# EAGLE board vd_using_sym (EAGLE 9.7.0)
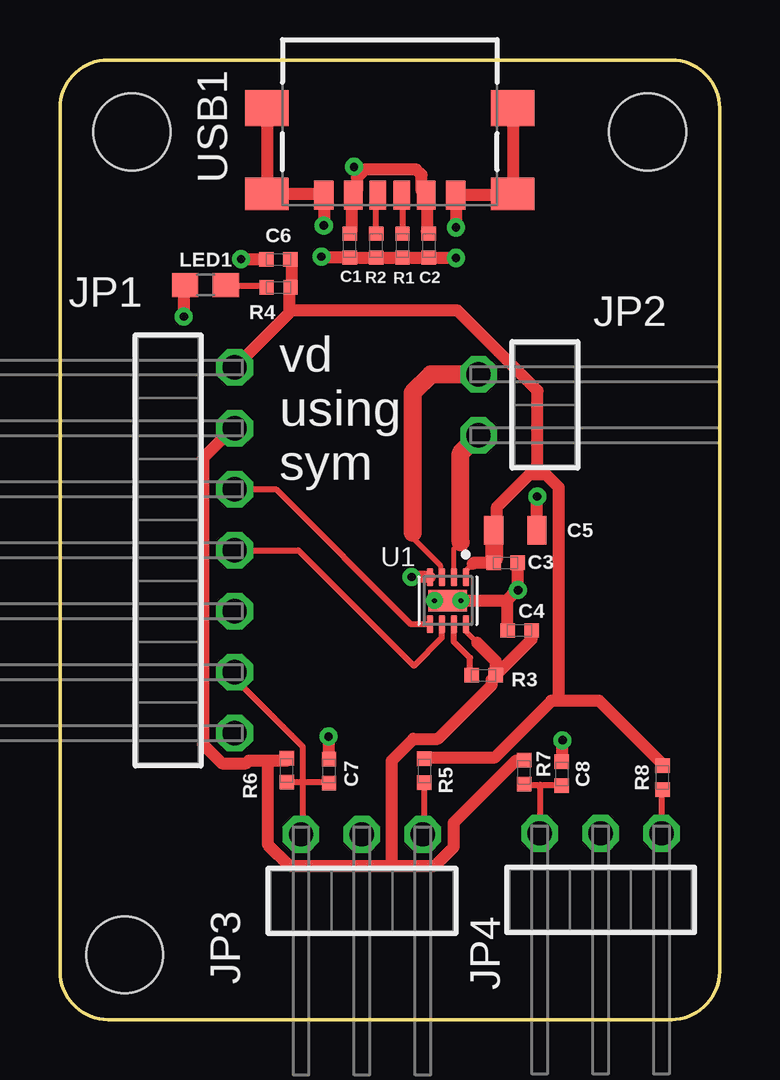
[diagram p0: board, top side]
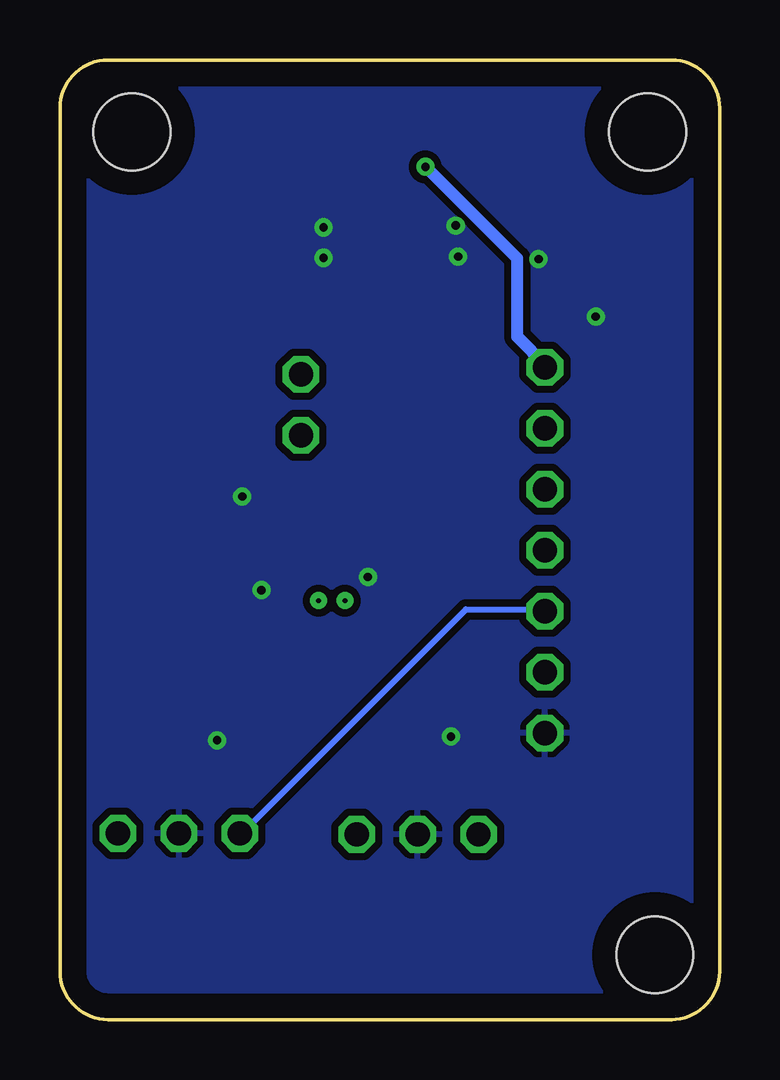
[diagram p1: board, bottom side, seen from below]

Size 27.5 x 40 mm. Coordinates in mm from the lower left corner, seen from the top.
Outline: 25.5,0 2,0 arc-90 0,2 0,38 arc-90 2,40 25.5,40 arc-90 27.5,38 27.5,2 arc-90 25.5,0
Copper layers (1*16): Top 0.035mm / dielectric 1.5mm / Bottom 0.035mm
Design rules "Fusion Electronics Design Rules": minimum track width 0.15mm, minimum drill 0.35mm, track to track 0.2mm, track to pad 0.2mm, pad to pad 0.2mm, via to via 0.2mm, smd to smd 0.2mm, copper to edge 1.02mm, drill to drill 0.2mm, minimum pad ring 10mil, minimum via ring 8mil, stop-mask expansion 4mil, vias tented up to drill 9999mil, thermal gap 10mil
Net classes: 0 default: width 0.25 mm; 1 Power: width 0.5 mm; 2 Motor_connections: width 0.75 mm
Holes 3.2 mm at 3,37 24.5,37 2.69,2.69

## Footprints (pad centres in the part's own frame; a part is rotated, then mirrored left to right if it is on the bottom)
0402-TIGHT = smd 0.6 x 0.6: 1 -0.5,0; 2 0.5,0
0805 = smd 0.8 x 1.2: 1 -0.9,0; 2 0.9,0
1X07_90 = drill 1.016 octagon: 1 -7.62,-2.77; 2 -5.08,-2.77; 3 -2.54,-2.77; 4 0,-2.77; 5 2.54,-2.77; 6 5.08,-2.77; 7 7.62,-2.77
1X02_90 = drill 1.016 octagon: 1 -1.27,-2.77; 2 1.27,-2.77
1X03_90 = drill 1.016 octagon: 1 -2.54,-2.77; 2 0,-2.77; 3 2.54,-2.77
0603 = smd 1.1 x 1: 1 -0.85,0; 2 0.85,0
SON50P200X200X80-9N = smd 0.76 x 0.28: 1 -0.985,0.75; 2 -0.985,0.25; 3 -0.985,-0.25; 4 -0.985,-0.75; 5 0.985,-0.75; 6 0.985,-0.25; 7 0.985,0.25; 8 0.985,0.75 | smd 0.9 x 1.6: 9 0,0 | drill 0.2 pad 0.4: 10 0,0.55; 11 0,-0.55
GCT_USB4135-GF-A_REVA = smd 0.7 x 1.2: A5 -0.5,3.635; B5 0.5,3.635 | smd 0.76 x 1.2: A9 1.52,3.635; B9 -1.52,3.635 | smd 0.8 x 1.2: A12 2.75,3.635; B12 -2.75,3.635 | smd 1.8 x 1.35: S1 -5.125,3.58; S4 5.125,3.58 | smd 1.8 x 1.5: S2 -5.125,0; S3 5.125,0

## Placement (x,y rotation side)
C1  0.1uF  [0402-TIGHT]  12.08,32.26 270 top
C2  0.1uF  [0402-TIGHT]  15.38,32.26 270 top
C3  0.1uF  [0402-TIGHT]  18.58,19.04 0 top
C4  0.1uF  [0402-TIGHT]  19.16,16.22 180 top
C5  10uF  [0805]  18.98,20.4 0 top
C6  0.1uF  [0402-TIGHT]  9.11,31.68 180 top
C7  0.1uF  [0402-TIGHT]  11.22,10.36 90 top
C8  0.1uF  [0402-TIGHT]  20.92,10.25 90 top
JP1  PINHD-1X7/90  [1X07_90]  4.51,19.56 90 top
JP2  PINHD-1X2/90  [1X02_90]  20.22,25.62 270 top
JP3  PINHD-1X3/90  [1X03_90]  12.59,4.95 180 top
JP4  PINHD-1X3/90  [1X03_90]  22.54,4.99 180 top
LED1  LTST-C191KGKT  [0603]  6.07,30.62 0 top
R1  5.1k  [0402-TIGHT]  14.28,32.26 90 top
R2  5.1k  [0402-TIGHT]  13.18,32.26 90 top
R3  10k  [0402-TIGHT]  17.66,14.35 180 top
R4  1k  [0402-TIGHT]  9.12,30.52 0 top
R5  100  [0402-TIGHT]  15.19,10.37 90 top
R6  10k  [0402-TIGHT]  9.45,10.39 270 top
R7  10k  [0402-TIGHT]  19.35,10.31 270 top
R8  100  [0402-TIGHT]  25.12,10.09 90 top
U1  DRV8838DSGR  [SON50P200X200X80-9N]  16.17,17.46 270 top
USB1  USB4135-GF-A_REVA  [GCT_USB4135-GF-A_REVA]  13.75,38 180 top

## Library data of the parts
C1-C4 C6-C8 = parts_req; PROD_ID: CAP-16507
C5 = parts_req; PROD_ID: CAP-14259
JP1 = parts_req; CATEGORY: Connectors; DESCRIPTION: Header-Right Angle-7 Position; PACKAGE_TYPE: Through Hole; PITCH: 0.100" (2.54mm); SUBCATEGORY: Headers; TYPE: Male Pins
JP2 = parts_req; CATEGORY: Connectors; DESCRIPTION: Header-Right Angle-2 Position; PACKAGE_TYPE: Through Hole; PITCH: 0.100" (2.54mm); SUBCATEGORY: Headers; TYPE: Male Pins
JP3 JP4 = parts_req; CATEGORY: Connectors; DESCRIPTION: Header-Right Angle-3 Position; PACKAGE_TYPE: Through Hole; PITCH: 0.100" (2.54mm); SUBCATEGORY: Headers; TYPE: Male Pins
LED1 = parts_req; AVAILABILITY: In Stock; CHECK_PRICES: https://www.snapeda.com/parts/LTST-C191KGKT/Lite-On/view-part/?ref=eda; DESCRIPTION: Green 571nm LED Indication - Discrete 2V 0603 (1608 Metric); MF: Lite-On Electronics; MP: LTST-C191KGKT; PACKAGE: 0603 Lite-On Inc.; PRICE: None; SNAPEDA_LINK: https://www.snapeda.com/parts/LTST-C191KGKT/Lite-On/view-part/?ref=snap
R1 R2 = SparkFun-Resistors; PROD_ID: RES-14340
R3 R6 R7 = parts_req; PROD_ID: RES-14241
R4 = parts_req; PROD_ID: RES-14342
R5 R8 = parts_req; PROD_ID: RES-14962
U1 = parts_req; AVAILABILITY: In Stock; CHECK_PRICES: https://www.snapeda.com/parts/DRV8838DSGR/Texas+Instruments/view-part/?ref=eda; DESCRIPTION: 11-V, 1.8-A H-bridge motor driver with phase/enable control; MF: Texas Instruments; MP: DRV8838DSGR; PACKAGE: WSON-8 Texas Instruments; PRICE: None; PURCHASE-URL: https://www.snapeda.com/api/url_track_click_mouser/?unipart_id=230046&manufacturer=Texas Instruments&part_name=DRV8838DSGR&search_term=drv8838dsgr; SNAPEDA_LINK: https://www.snapeda.com/parts/DRV8838DSGR/Texas+Instruments/view-part/?ref=snap
USB1 = parts_req; AVAILABILITY: In Stock; CHECK_PRICES: https://www.snapeda.com/parts/USB4135-GF-A/Global+Connector+Technology/view-part/?ref=eda; DESCRIPTION: Type C Receptacle, Horizontal, SMT, For Power Charging Only; MF: Global Connector Technology; MP: USB4135-GF-A; PACKAGE: None; PRICE: None; PURCHASE-URL: https://www.snapeda.com/api/url_track_click_mouser/?unipart_id=9604007&manufacturer=Global Connector Technology&part_name=USB4135-GF-A&search_term=type c usb power only; SNAPEDA_LINK: https://www.snapeda.com/parts/USB4135-GF-A/Global+Connector+Technology/view-part/?ref=snap

## Nets
3.3V [Power]: C4.1 JP1.6 R3.1 R6.1 R7.1 U1.8
5V [Power]: C1.1 C2.1 C3.1 C5.1 C6.1 JP1.7 R4.2 R5.2 R8.2 U1.1 USB1.A9 USB1.B9
GND [Power]: C1.2 C2.2 C3.2 C4.2 C5.2 C6.2 C7.2 C8.2 JP1.1 JP3.2 JP4.2 LED1.1 R1.1 R2.1 U1.4 U1.9 USB1.A12 USB1.B12 USB1.S1 USB1.S2 USB1.S3 USB1.S4
M1 [Motor_connections]: JP2.2 U1.2
M2 [Motor_connections]: JP2.1 U1.3
MOTOR_DIR: JP1.4 U1.6
MOTOR_PWM: JP1.5 U1.5
N$1: R1.2 USB1.A5
N$2: R2.2 USB1.B5
N$3: R3.2 U1.7
N$4: LED1.2 R4.1
N$5: JP3.1 R5.1
N$7: JP4.1 R8.1
O1: C7.1 JP1.2 JP3.3 R6.2
O2: C8.1 JP1.3 JP4.3 R7.2

## Tracks (layer width: path | path; a pad name or v marks a point on that pad's centre or on a via)
3.3V
  Top 0.2: 16.92,16.28 U1.8 16.92,16.18 17.4,15.7
  Top 0.5: 17.4,15.7 18.16,14.94 R3.1 | C4.1 19.66,15.85 R3.1 | 8.66,10.8 7.88,10.8 7.76,10.69 6.75,10.69 5.96,11.47 5.96,23.4 7.2,24.64 JP1.6 | 8.66,10.8 9.45,10.8 R6.1 | 13.84,6.41 9.56,6.41 8.66,7.31 8.66,10.8 | 13.84,6.41 15.64,6.41 16.43,7.2 16.43,8.21 19.01,10.8 R7.1 | 13.84,6.41 13.84,10.8 14.74,11.7 15.75,11.7 18,13.95 18,14.18 R3.1
5V  (via drill 0.35)
  Top 0.2: U1.1 16.92,18.72 17.2,19
  Top 0.5: 17.2,19 17.24,19.04 C3.1 18.11,19.24 | C1.1 12.15,32.85 12.15,34.31 USB1.A9 12.38,34.54 12.38,35.1 12.54,35.27 | C2.1 15.3,32.85 15.3,34.31 USB1.B9 15.07,34.54 15.07,35.21 14.85,35.44 12.71,35.44 12.54,35.27 | C6.1 9.68,31.61 9.68,30.6 R4.2 9.56,30.26 9.56,29.55 | 9.56,29.55 9.56,29.48 7.31,27.23 JP1.7 | v12.26,35.55 12.54,35.27 | 18.11,20.36 C5.1 18.23,20.59 18.23,21.38 19.57,22.73 19.91,22.73 | 20.79,13.29 22.49,13.29 25.09,10.69 R8.2 | 20.79,13.29 20.49,13.29 18.11,10.91 15.3,10.91 R5.2 | 19.91,22.73 20.25,22.73 20.79,22.18 20.79,13.29 | 9.56,29.55 16.57,29.55 19.91,26.21 19.91,22.73
  Top 0.75: 18.11,19.24 18.11,20.36
  Bottom 0.5: v12.26,35.55 8.44,31.73 8.44,28.46 7.2,27.23 JP1.7
GND  (via drill 0.35)
  Top 0.5: USB1.S3 USB1.S4 10.95,34.42 USB1.A12 v11,33.1 | USB1.S2 USB1.S1 18.82,34.37 USB1.B12 16.51,34.35 v16.51,33.02 | C1.2 | v16.51,31.75 v16.5,31.76 C2.2 R1.1 R2.1 C1.2 | C6.2 7.62,31.68 7.6,31.7 v7.55,31.7 | LED1.1 5.16,30.56 v5.16,29.3 5.14,29.28 | C5.2 19.88,21.78 v19.9,21.8 | C3.2 19.08,17.92 | 19.08,17.92 v19.1,17.9 | C4.2 18.66,17.5 | 18.66,17.5 18.62,17.46 U1.9 | C7.2 11.22,11.78 v11.2,11.8 | v20.95,11.64 20.92,11.61 C8.2 | C1.2 10.94,31.76 v10.9,31.8 | 18.66,17.5 19.08,17.92 | U1.4 v14.66,18.45
  pour Bottom (isolate 0.3): -6.25,-6.25 35.46,-6.25 35.46,46.89 -6.25,46.89
M1
  Top 0.2: 16.7,19.9 16.42,19.62 U1.2
  Top 0.75: 16.7,19.9 16.7,23.6 JP2.2
M2
  Top 0.2: U1.3 15.86,18.5 15.86,18.93 14.7,20.09 14.7,20.3
  Top 0.75: 14.7,20.3 14.7,26.13 15.46,26.89 JP2.1
MOTOR_DIR
  Top 0.25: 7.31,19.46 JP1.4 9.94,19.56 14.75,14.75 15.92,15.92 U1.6
MOTOR_PWM
  Top 0.25: 15.41,16.54 U1.5 14.64,16.48 9.03,22.09 JP1.5
N$1
  Top 0.25: R1.2 14.29,32.85 14.29,34.31 USB1.A5
N$2
  Top 0.25: R2.2 13.16,32.85 13.16,34.31 USB1.B5
N$3
  Top 0.25: R3.2 17.1,14.4 17.1,15.07 16.43,15.75 16.43,16.43 U1.7
N$4
  Top 0.25: R4.1 8.55,30.6 6.97,30.6 LED1.2
N$5
  Top 0.25: R5.1 15.19,9.79 15.19,7.76 JP3.1
N$7
  Top 0.25: R8.1 25.09,9.56 JP4.1
O1
  Top 0.25: 10.12,9.9 R6.2 | 10.12,9.9 11.14,9.9 C7.1 | 10.12,9.9 10.12,7.76 JP3.3 | 10.12,9.9 10.12,11.36 7.31,14.18 7.31,14.4 JP1.2
O2
  Top 0.25: 20.02,9.79 19.35,9.79 R7.2 | 20.02,9.79 20.81,9.79 C8.1 | 20.02,9.79 20.02,7.76 JP4.3
  Bottom 0.25: JP1.3 7.31,17.1 10.57,17.1 19.91,7.76 JP4.3

## Text on the board
tPlace: vd / using / sym